# EAGLE board pcb (EAGLE 9.7.0)
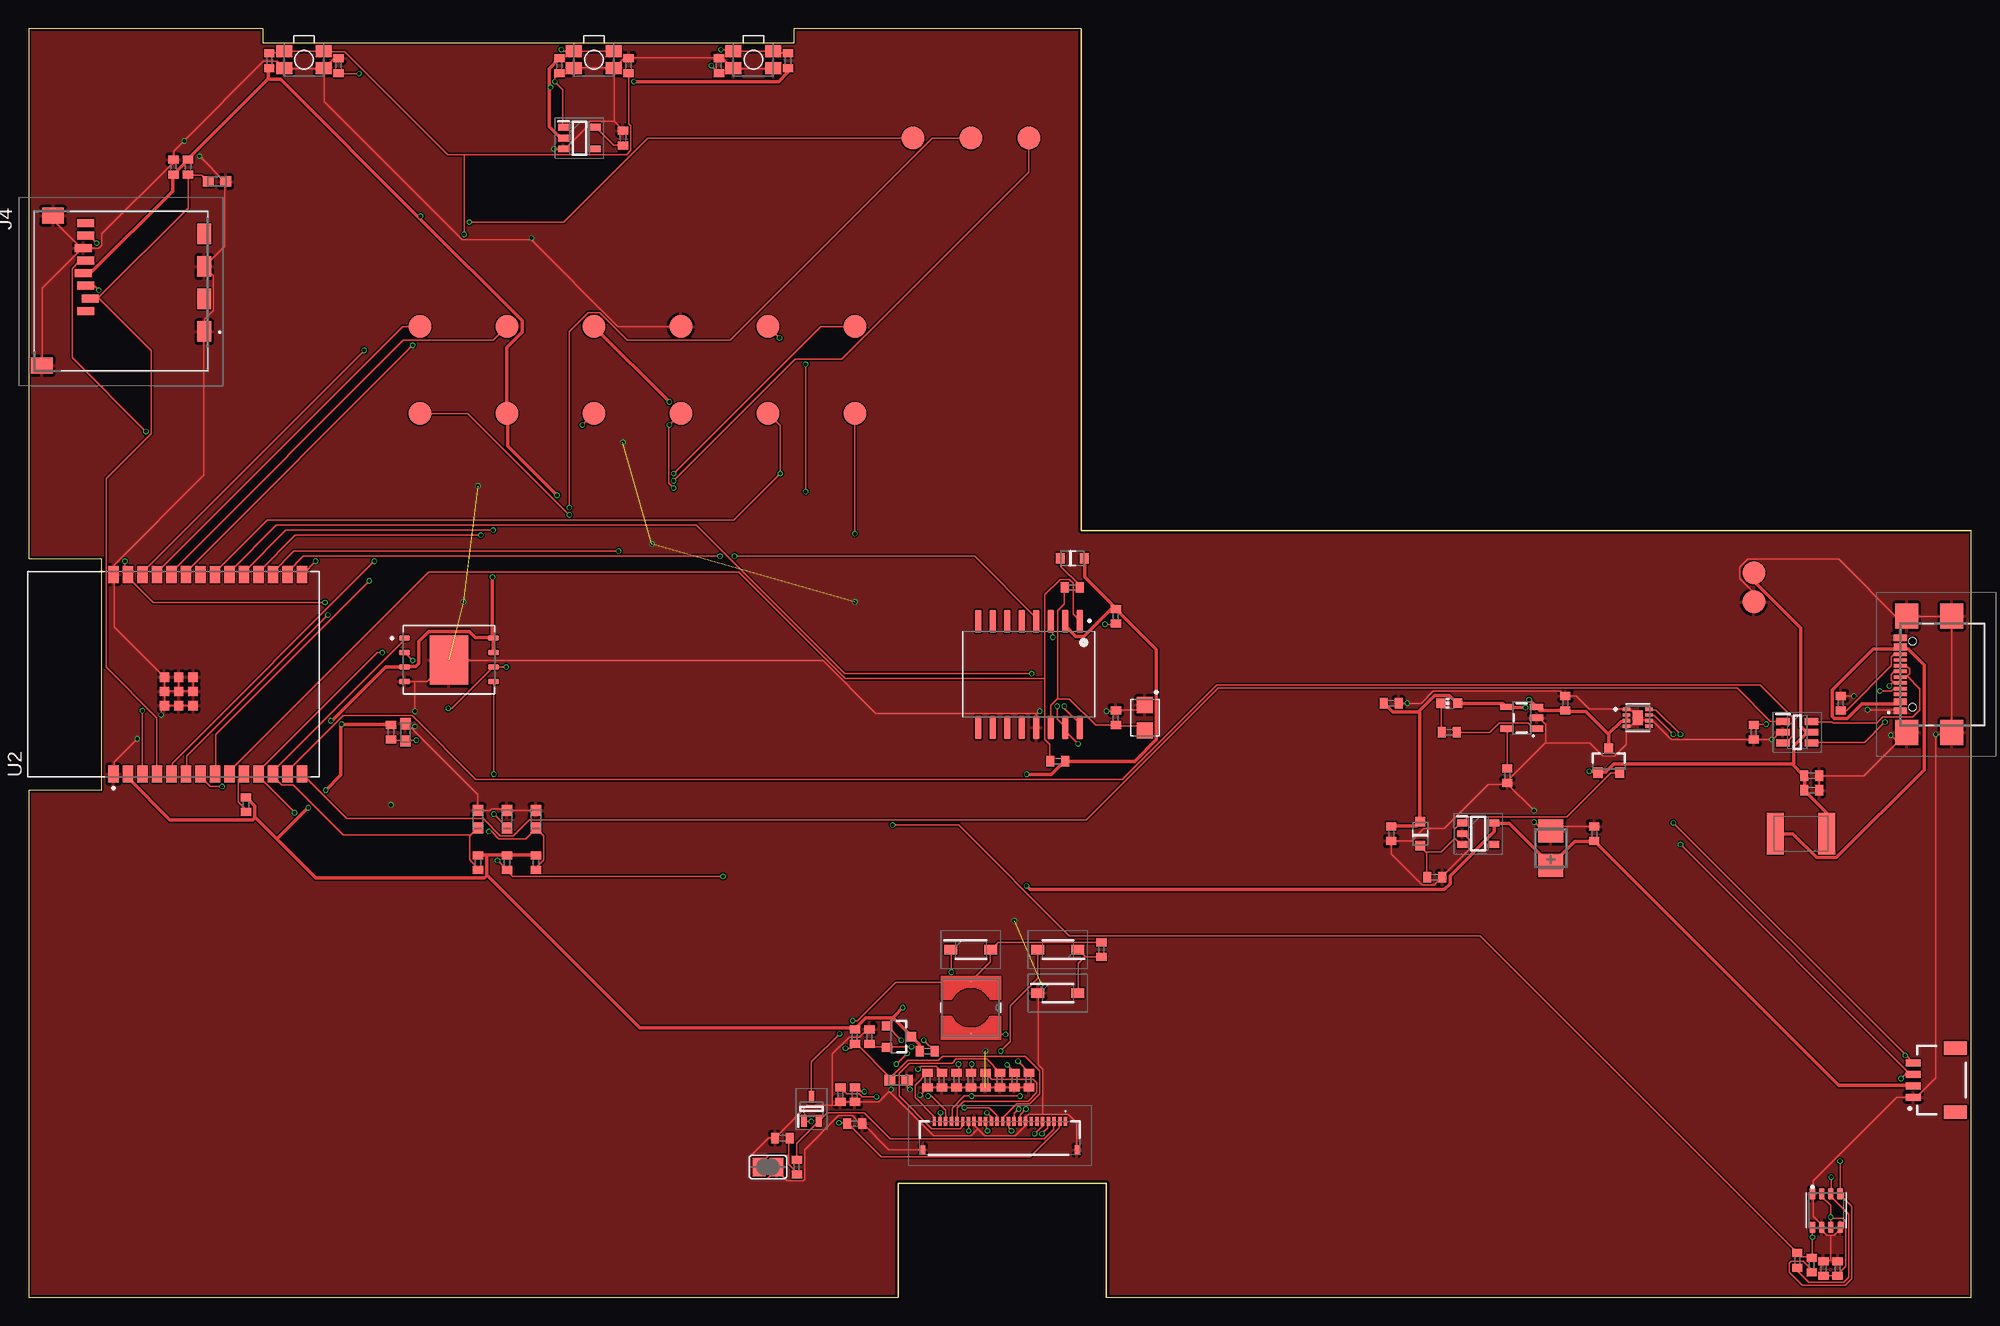
[diagram p0: board, top side]
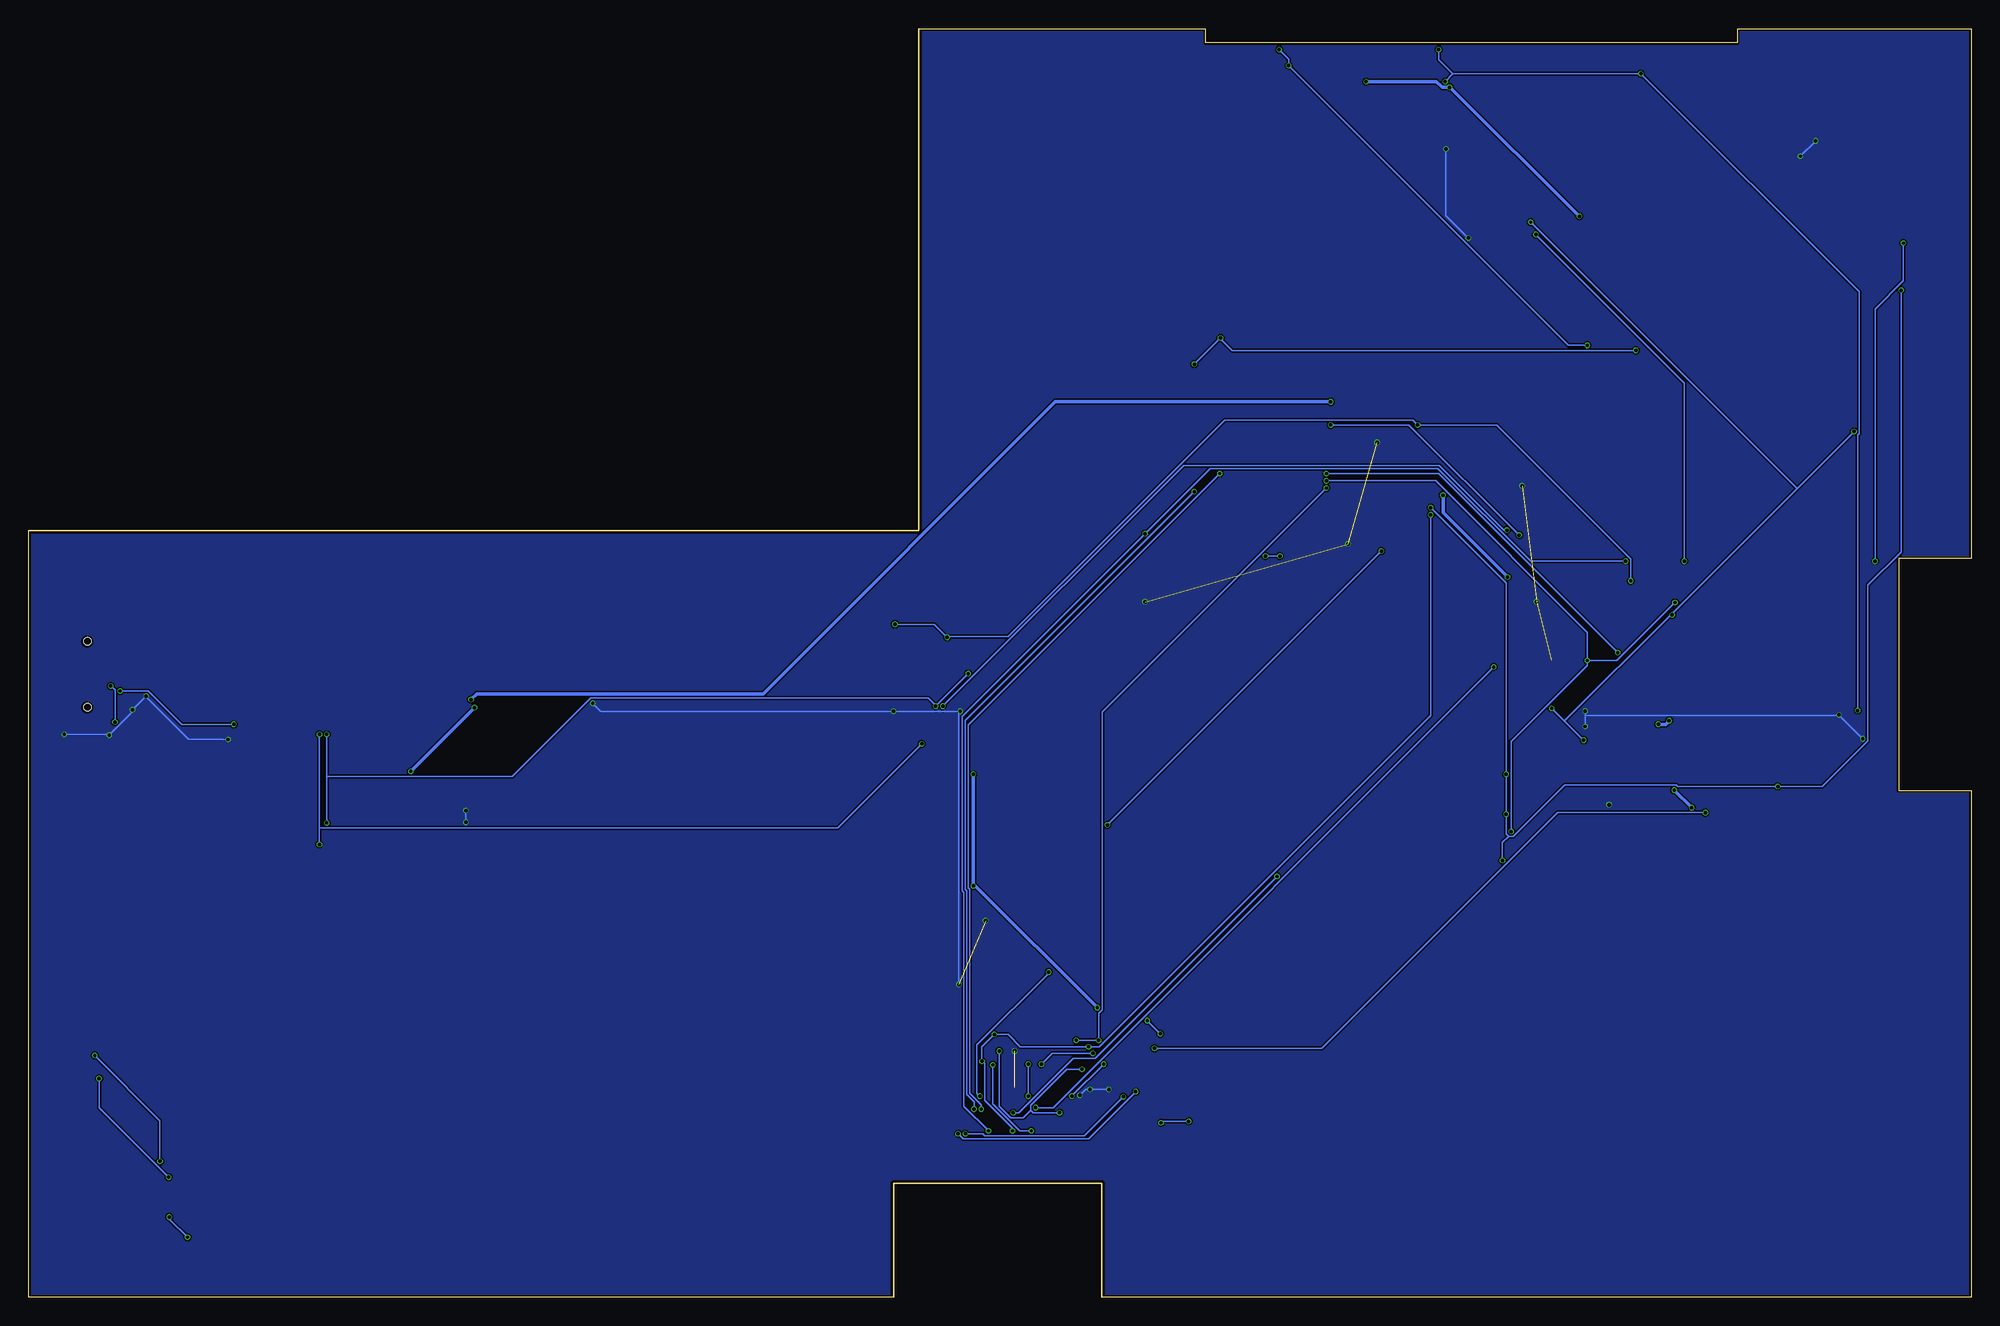
[diagram p1: board, bottom side, seen from below]

Size 170.2 x 111.2 mm. Coordinates in mm from the lower left corner, seen from the top.
Outline: 0,0 76.2,0 76.2,10 94.4,10 94.4,0 170.2,0 170.2,67.2 92.2,67.2 92.2,111.2 67.1,111.2 67.1,109.94 20.5,109.94 20.5,111.2 0,111.2 0,64.77 6.35,64.77 6.35,44.45 0,44.45 0,0
Copper layers (1*16): Top 0.035mm / dielectric 1.6mm / Bottom 0.035mm
Design rules "jlcpcb-2layers.dru": minimum track width 5mil, minimum drill 0.3mm, track to track 5mil, track to pad 5mil, pad to pad 5mil, via to via 5mil, smd to smd 5mil, copper to edge 0.2mm, drill to drill 6mil, minimum pad ring 10mil, minimum via ring 3mil, stop-mask expansion 4mil, vias tented up to drill 0mil, thermal gap 10mil
Net classes: 1 powerlines: width 0.3 mm

## Footprints (pad centres in the part's own frame; a part is rotated, then mirrored left to right if it is on the bottom)
MYBUTTON = smd 1.4 x 1.05: 1 1.75,0.75; 2 -1.75,0.75; 3 -1.75,-0.75; 4 1.75,-0.75
ESP32_WROVER_EAGLE-LTSPICE_C0402 = smd 0.7 x 0.9: 1 -0.65,0; 2 0.65,0
RCL_CT3528 = smd 2 x 2.2: + -1.5,0; - 1.5,0
EAGLE-LTSPICE_C0402 = smd 0.7 x 0.9: 1 -0.65,0; 2 0.65,0
CAPCP3225X100N = smd 1.4 x 1.4: 1 -1.1,0; 2 1.1,0
ADAFRUIT_CHIP-LED0603 = smd 0.8 x 0.8: A 0,-0.75; C 0,0.75
SOT95P280X145-6N = smd 1.2 x 0.6: 1 -1.25,0.95; 2 -1.25,0; 3 -1.25,-0.95; 4 1.25,-0.95; 5 1.25,0; 6 1.25,0.95
ESP32_WROVER_AVX---SD0805S020S1R0_AVX_SD0805S020S1R0_0 = smd 0.8 x 0.9: 1 -1.05,0; 2 1.05,0
SOD3716X135N = smd 1.15 x 0.8: 1 -1.75,0; 2 1.75,0
DIOC1608X36N = smd 0.97 x 0.94: 1 -0.75,0; 2 0.75,0
SOT95P280X125-5N = smd 0.9 x 0.6: 1 -1.4,0.95; 2 -1.4,0; 3 -1.4,-0.95; 4 1.4,-0.95; 5 1.4,0.95
SOT95P280X120-5N = smd 0.9 x 0.6: 1 -1.4,0.95; 2 -1.4,0; 3 -1.4,-0.95; 4 1.4,-0.95; 5 1.4,0.95
FH34SRJ24S05SH99 = smd 0.3 x 0.8: 1 5.75,1.45; 2 5.25,1.45; 3 4.75,1.45; 4 4.25,1.45; 5 3.75,1.45; 6 3.25,1.45; 7 2.75,1.45; 8 2.25,1.45; 9 1.75,1.45; 10 1.25,1.45; 11 0.75,1.45; 12 0.25,1.45; 13 -0.25,1.45; 14 -0.75,1.45; 15 -1.25,1.45; 16 -1.75,1.45; 17 -2.25,1.45; 18 -2.75,1.45; 19 -3.25,1.45; 20 -3.75,1.45; 21 -4.25,1.45; 22 -4.75,1.45; 23 -5.25,1.45; 24 -5.75,1.45 | smd 0.4 x 0.8: MP1 6.75,-1.05; MP2 -6.75,-1.05
SAMACSYS_PARTS_USB4110GFA = smd 0.3 x 1.15: A1 -3.35,3.678; A4 -2.55,3.678; A5 -1.25,3.678; A6 -0.25,3.678; A7 0.25,3.678; A8 1.25,3.678; A9 2.55,3.678; A12 3.35,3.678; B1 3.05,3.678; B4 2.25,3.678; B5 1.75,3.678; B6 0.75,3.678; B7 -0.75,3.678; B8 -1.75,3.678; B9 -2.25,3.678; B12 -3.05,3.678 | smd 2.18 x 2: MP1 -5.11,-0.827; MP2 5.11,-0.827; MP3 -5.11,3.103; MP4 5.11,3.103 | hole 0.65: -2.89,2.603; 2.89,2.603
JST04_1MM_RA = smd 0.6 x 1.35: 1 -1.5,0; 2 -0.5,0; 3 0.5,0; 4 1.5,0 | smd 1.2 x 2: NC1 2.8,-3.675; NC2 -2.8,-3.675
112ATAARR03ATTEND = smd 1.8 x 1.2: G1 10.6,10.4; G2 4.9,10.4; S1 7.75,10.4; S2 2.05,10.4 | smd 1.4 x 1.9: G3 13.6,-3.85; G4 0.45,-2.85 | smd 0.7 x 1.5: P1 8.8,0; P2 7.7,0.4; P3 6.6,0; P4 5.5,-0.2; P5 4.4,0; P6 3.3,-0.2; P7 2.2,0; P8 1.1,0
IND_4828-WE-TPC_WRE = smd 0.127 x 0.127: 1 -2.286,0; 2 2.286,0
ESP32_WROVER_SPARKFUN-IC-POWER_SOT23-5 = smd 0.55 x 1.2: 1 -0.95,-1.3; 2 0,-1.3; 3 0.95,-1.3; 4 0.95,1.3; 5 -0.95,1.3
ESP32C6_VARISTOR_CT/CN1812 = smd 1.5 x 3.6: 1 -2.25,0; 2 2.25,0
ESP32_WROVER_SPARKFUN-DISCRETESEMI_SOT23-3 = smd 0.8 x 0.9: 1 -0.95,-1; 2 0.95,-1; 3 0,1.1
SOT65P210X110-3N = smd 1.05 x 0.5: 1 -1.05,0.65; 2 -1.05,-0.65; 3 1.05,0
ESP32_WROVER_EAGLE-LTSPICE_R0402 = smd 0.7 x 0.9: 1 -0.65,0; 2 0.65,0
ESP32_WROVER_BME680_PSON80P300X300X100-8N = smd 1.016 x 0.5: 1 1.458,1.2; 2 1.458,0.4; 3 1.458,-0.4; 4 1.458,-1.2; 5 -1.458,-1.22; 6 -1.458,-0.4; 7 -1.458,0.4; 8 -1.458,1.2
SJ = smd 1.168 x 1.6: 1 -0.762,0; 2 0.762,0
TP20R = smd 2 x 2: TP 0,0
SON127P600X800X80-9N = smd 0.94 x 0.44: 1 -3.895,1.905; 2 -3.895,0.635; 3 -3.895,-0.635; 4 -3.895,-1.905; 5 3.895,-1.905; 6 3.895,-0.635; 7 3.895,0.635; 8 3.895,1.905 | smd 3.4 x 4.3: 9 0,0
XCVR_ESP32-C6-WROOM-1-N8 = smd 1.5 x 0.9: 1 -8.75,5.26; 2 -8.75,3.99; 3 -8.75,2.72; 4 -8.75,1.45; 5 -8.75,0.18; 6 -8.75,-1.09; 7 -8.75,-2.36; 8 -8.75,-3.63; 9 -8.75,-4.9; 10 -8.75,-6.17; 11 -8.75,-7.44; 12 -8.75,-8.71; 13 -8.75,-9.98; 14 -8.75,-11.25; 15 8.75,-11.25; 16 8.75,-9.98; 17 8.75,-8.71; 18 8.75,-7.44; 19 8.75,-6.17; 20 8.75,-4.9; 21 8.75,-3.63; 22 8.75,-2.36; 23 8.75,-1.09; 24 8.75,0.18; 25 8.75,1.45; 26 8.75,2.72; 27 8.75,3.99; 28 8.75,5.26 | smd 0.8 x 0.8: 29_1 -2.755,0.79; 29_2 -1.505,0.79; 29_3 -0.255,0.79; 29_4 -2.755,-0.46; 29_5 -1.505,-0.46; 29_6 -0.255,-0.46; 29_7 -2.755,-1.71; 29_8 -1.505,-1.71; 29_9 -0.255,-1.71
SOIC127P1032X265-16N = smd 2.05 x 0.59: 1 -4.655,4.445; 2 -4.655,3.175; 3 -4.655,1.905; 4 -4.655,0.635; 5 -4.655,-0.635; 6 -4.655,-1.905; 7 -4.655,-3.175; 8 -4.655,-4.445; 9 4.655,-4.445; 10 4.655,-3.175; 11 4.655,-1.905; 12 4.655,-0.635; 13 4.655,0.635; 14 4.655,1.905; 15 4.655,3.175; 16 4.655,4.445
SON50P200X200X80-9N = smd 0.76 x 0.27: 1 -0.985,0.75; 2 -0.985,0.25; 3 -0.985,-0.25; 4 -0.985,-0.75; 5 0.985,-0.75; 6 0.985,-0.25; 7 0.985,0.25; 8 0.985,0.75 | smd 0.9 x 1.3: 9 0,0

## Placement (x,y rotation side)
BOOT_BUTTON  BUTTON_CUSYOMV1  [MYBUTTON]  24.13,108.45 180 top
C1  100nF  [ESP32_WROVER_EAGLE-LTSPICE_C0402]  157.24,2.54 90 top
C1_BAT  4.7uF  [ESP32_WROVER_EAGLE-LTSPICE_C0402]  119.38,52.07 0 top
C1_BAT1  4.7uF  [ESP32_WROVER_EAGLE-LTSPICE_C0402]  123.19,36.83 0 top
C1_BAT2  4.7uF  [ESP32_WROVER_EAGLE-LTSPICE_C0402]  137.16,40.64 90 top
C2  100nF  [ESP32_WROVER_EAGLE-LTSPICE_C0402]  158.47,2.54 90 top
C2_BAT  4.7uF  [ESP32_WROVER_EAGLE-LTSPICE_C0402]  134.62,52.07 90 top
C3  100uF TANT  [RCL_CT3528]  133.35,39.37 90 top
C4  4.7uF/25V  [EAGLE-LTSPICE_C0402]  93.98,30.48 90 top
C4_USB  100nF  [EAGLE-LTSPICE_C0402]  156.21,45.72 0 top
C5  1uF  [ESP32_WROVER_EAGLE-LTSPICE_C0402]  27.16,107.95 90 top
C5_USB  4.7uF  [EAGLE-LTSPICE_C0402]  156.21,44.45 0 top
C6  100nF  [ESP32_WROVER_EAGLE-LTSPICE_C0402]  52.56,107.95 90 top
C7  10uF  [EAGLE-LTSPICE_C0402]  73.66,22.86 90 top
C8  100nF  [ESP32_WROVER_EAGLE-LTSPICE_C0402]  95.25,50.8 90 top
C9  100nF  [ESP32_WROVER_EAGLE-LTSPICE_C0402]  12.7,99.06 90 top
C10  100nF  [ESP32_WROVER_EAGLE-LTSPICE_C0402]  60.47,107.95 90 top
C10_SUPERCAP  CPH3225A  [CAPCP3225X100N]  97.79,50.8 270 top
C_DELAY  100nF  [ESP32_WROVER_EAGLE-LTSPICE_C0402]  52.07,101.6 90 top
CHANGE_BUTTON  BUTTON_CUSYOMV1  [MYBUTTON]  63.5,108.45 180 top
CHG_LED  [ADAFRUIT_CHIP-LED0603]  124.46,52.07 90 top
D1  USBLC6-2SC6Y  [SOT95P280X145-6N]  154.94,49.53 0 top
D2  ESP32_WROVER_AVX---SD0805S020S1R0_AVX_SD0805S020S1R0_0_0AVX_SD0805S020S1R0_0_0  [ESP32_WROVER_AVX---SD0805S020S1R0_AVX_SD0805S020S1R0_0]  121.92,40.64 90 top
D3  MBR0530  [SOD3716X135N]  90.17,26.67 0 top
D4  MBR0530  [SOD3716X135N]  90.17,30.48 180 top
D5  MBR0530  [SOD3716X135N]  82.55,30.48 0 top
D6  PGB1010603MR  [DIOC1608X36N]  76.2,19.05 0 top
D7  ESP32_WROVER_AVX---SD0805S020S1R0_AVX_SD0805S020S1R0_0_0AVX_SD0805S020S1R0_0_0  [ESP32_WROVER_AVX---SD0805S020S1R0_AVX_SD0805S020S1R0_0]  91.44,64.77 0 top
D8  PGB1010603MR  [DIOC1608X36N]  16.51,97.79 0 top
D9  PGB1010603MR  [DIOC1608X36N]  39.37,41.91 90 top
D10  PGB1010603MR  [DIOC1608X36N]  33.02,49.53 90 top
D11  PGB1010603MR  [DIOC1608X36N]  41.91,41.91 90 top
D12  PGB1010603MR  [DIOC1608X36N]  44.45,41.91 90 top
EPD_C1  1uF/50V  [EAGLE-LTSPICE_C0402]  72.39,17.78 90 top
EPD_C2  1uF/50v  [EAGLE-LTSPICE_C0402]  71.12,17.78 90 top
EPD_C5  0.1uF/50V  [EAGLE-LTSPICE_C0402]  87.63,19.05 90 top
EPD_C6  1uF/50V  [EAGLE-LTSPICE_C0402]  86.36,19.05 90 top
EPD_C7  1uF/50V  [EAGLE-LTSPICE_C0402]  85.09,19.05 90 top
EPD_C8  1uF/50V  [EAGLE-LTSPICE_C0402]  83.82,19.05 90 top
EPD_C9  1uF/50V  [EAGLE-LTSPICE_C0402]  82.55,19.05 90 top
EPD_C10  1uF/50V  [EAGLE-LTSPICE_C0402]  81.28,19.05 90 top
EPD_C11  1uF/50V  [EAGLE-LTSPICE_C0402]  80.01,19.05 90 top
EPD_C12  1uF/50V  [EAGLE-LTSPICE_C0402]  78.74,19.05 90 top
IC1  BD5229G-TR  [SOT95P280X125-5N]  48.26,101.6 0 top
IC4  XC6220A331MR-G  [SOT95P280X120-5N]  127,40.64 0 top
J1  FH34SRJ-24S-0.5SH_99_  [FH34SRJ24S05SH99]  85.09,13.97 0 top
J2  SAMACSYS_PARTS_USB4110-GF-A  [SAMACSYS_PARTS_USB4110GFA]  167.64,54.61 90 top
J3  QWIIC_RIGHT_ANGLE  [JST04_1MM_RA]  165.1,19.05 90 top
J4  112A-TAAR-R03_ATTEND  [112ATAARR03ATTEND]  5,95.25 270 top
L1  68uH  [IND_4828-WE-TPC_WRE]  82.55,25.39 270 top
MCP73831  ESP32_WROVER_SPARKFUN-IC-POWER_MCP73831  [ESP32_WROVER_SPARKFUN-IC-POWER_SOT23-5]  130.81,50.8 90 top
PFMF.050.1  ESP32C6_VARISTORCN1812  [ESP32C6_VARISTOR_CT/CN1812]  155.26,40.64 0 top
Q1  20V/4.2A/52mΩ/1.4W  [ESP32_WROVER_SPARKFUN-DISCRETESEMI_SOT23-3]  138.43,46.99 0 top
Q2  20V/4.2A/52mΩ/1.4W  [ESP32_WROVER_SPARKFUN-DISCRETESEMI_SOT23-3]  76.2,22.86 270 top
Q3  SI1308EDL-T1-GE3  [SOT65P210X110-3N]  68.58,16.51 90 top
R1  10K  [ESP32_WROVER_EAGLE-LTSPICE_R0402]  19.05,43.18 90 top
R1_BAT  200  [ESP32_WROVER_EAGLE-LTSPICE_R0402]  124.46,49.53 0 top
R1_PINH  10K  [ESP32_WROVER_EAGLE-LTSPICE_R0402]  154.94,3.26 90 top
R1_PINH1  10K  [ESP32_WROVER_EAGLE-LTSPICE_R0402]  95.25,59.69 90 top
R1_PWRUSB  100K  [ESP32_WROVER_EAGLE-LTSPICE_R0402]  119.38,40.64 90 top
R2  2.2  [ESP32_WROVER_EAGLE-LTSPICE_R0402]  66.04,13.97 0 top
R2-USB  5k1  [ESP32_WROVER_EAGLE-LTSPICE_R0402]  158.75,52.07 90 top
R2-USB1  5k1  [ESP32_WROVER_EAGLE-LTSPICE_R0402]  151.13,49.53 90 top
R2_BAT  2K  [ESP32_WROVER_EAGLE-LTSPICE_R0402]  129.54,45.72 90 top
R2_PINH  10K  [ESP32_WROVER_EAGLE-LTSPICE_R0402]  156.21,2.85 90 top
R2_PINH1  10K  [ESP32_WROVER_EAGLE-LTSPICE_R0402]  90.17,46.99 0 top
R3  0.47  [ESP32_WROVER_EAGLE-LTSPICE_R0402]  67.31,11.43 90 top
R4  10K  [ESP32_WROVER_EAGLE-LTSPICE_R0402]  72.39,15.24 180 top
R5  10K  [ESP32_WROVER_EAGLE-LTSPICE_R0402]  39.37,38.1 90 top
R6  10K  [ESP32_WROVER_EAGLE-LTSPICE_R0402]  31.75,49.53 90 top
R7  10K  [ESP32_WROVER_EAGLE-LTSPICE_R0402]  41.91,38.1 90 top
R8  10K  [ESP32_WROVER_EAGLE-LTSPICE_R0402]  44.45,38.1 90 top
R9  10K  [ESP32_WROVER_EAGLE-LTSPICE_R0402]  72.39,22.86 90 top
R10  10K  [ESP32_WROVER_EAGLE-LTSPICE_R0402]  13.97,99.06 90 top
R_BOOT  10K  [ESP32_WROVER_EAGLE-LTSPICE_R0402]  21.08,108.38 270 top
R_CAPACITOR  15  [ESP32_WROVER_EAGLE-LTSPICE_R0402]  91.44,62.23 0 top
R_CHANGE  10K  [ESP32_WROVER_EAGLE-LTSPICE_R0402]  66.53,108.38 270 top
R_CL1  10K  [ESP32_WROVER_EAGLE-LTSPICE_R0402]  78.74,21.59 180 top
R_RESET  10K  [ESP32_WROVER_EAGLE-LTSPICE_R0402]  46.5,107.95 90 top
RESET_BUTTON  BUTTON_CUSYOMV1  [MYBUTTON]  49.53,108.47 180 top
SENSOR2  ESP32_WROVER_BME680_BME680  [ESP32_WROVER_BME680_PSON80P300X300X100-8N]  157.48,7.62 90 top
SJ1  [SJ]  64.77,11.43 180 top
TP1  TPTP20R  [TP20R]  34.29,85.09 0 top
TP2  TPTP20R  [TP20R]  41.91,85.09 0 top
TP3  TPTP20R  [TP20R]  49.53,85.09 0 top
TP4  TPTP20R  [TP20R]  151.13,60.96 0 top
TP5  TPTP20R  [TP20R]  57.15,85.09 0 top
TP6  TPTP20R  [TP20R]  87.63,101.6 0 top
TP7  TPTP20R  [TP20R]  82.55,101.6 0 top
TP8  TPTP20R  [TP20R]  77.47,101.6 0 top
TP9  TPTP20R  [TP20R]  64.77,85.09 0 top
TP10  TPTP20R  [TP20R]  72.39,85.09 0 top
TP11  TPTP20R  [TP20R]  72.39,77.47 0 top
TP12  TPTP20R  [TP20R]  64.77,77.47 0 top
TP13  TPTP20R  [TP20R]  57.15,77.47 0 top
TP14  TPTP20R  [TP20R]  151.13,63.5 0 top
TP15  TPTP20R  [TP20R]  49.53,77.47 0 top
TP16  TPTP20R  [TP20R]  41.91,77.47 0 top
TP17  TPTP20R  [TP20R]  34.29,77.47 0 top
U1  W25Q512JVEIQ  [SON127P600X800X80-9N]  36.83,55.88 0 top
U2  ESP32-C6-WROOM-1-N8  [XCVR_ESP32-C6-WROOM-1-N8]  12.7,54.61 90 top
U3  DS3231SN#  [SOIC127P1032X265-16N]  87.63,54.61 270 top
U4  MAX17048G+T10  [SON50P200X200X80-9N]  140.97,50.8 0 top

## Library data of the parts
BOOT_BUTTON CHANGE_BUTTON CHG_LED PFMF.050.1 RESET_BUTTON SJ1 TP1-TP17 = DeskAssistant v19 v1
C1 C1_BAT C1_BAT1 C1_BAT2 C2 C2_BAT C4 C4_USB C5 C5_USB C6-C10 C_DELAY EPD_C1 EPD_C2 EPD_C5-EPD_C12 = DeskAssistant v19 v1; SPICEMODEL: NONE; SPICEPREFIX: C
C3 = DeskAssistant v19 v1; SPICEPREFIX: C
C10_SUPERCAP = DeskAssistant v19 v1; AVAILABILITY: Not in stock; CHECK_PRICES: https://www.snapeda.com/parts/CPH3225A/Seiko+Instruments/view-part/?ref=eda; DESCRIPTION: 11 mF (EDLC) Supercapacitor 3.3 V 1210 (3225 Metric) - -; MF: Seiko Instruments; MP: CPH3225A; PACKAGE: 1210 Seiko; PRICE: None; PURCHASE-URL: https://www.snapeda.com/api/url_track_click_mouser/?unipart_id=562593&manufacturer=Seiko Instruments&part_name=CPH3225A&search_term=None; SNAPEDA_LINK: https://www.snapeda.com/parts/CPH3225A/Seiko+Instruments/view-part/?ref=snap
D1 = DeskAssistant v19 v1; AVAILABILITY: In Stock; CHECK_PRICES: https://www.snapeda.com/parts/USBLC6-2SC6Y/STMicroelectronics/view-part/?ref=eda; DESCRIPTION: 17V Clamp 5A (8/20µs) Ipp Tvs Diode Surface Mount SOT-23-6; MF: STMicroelectronics; MP: USBLC6-2SC6Y; PACKAGE: SOT-23-6 STMicroelectronics; PRICE: None; SNAPEDA_LINK: https://www.snapeda.com/parts/USBLC6-2SC6Y/STMicroelectronics/view-part/?ref=snap
D2 D7 = DeskAssistant v19 v1; CENTROID_NOT_SPECIFIED: No; DATASHEET: http://datasheets.avx.com/schottky.pdf; DIGIKEY_DESCRIPTION: DIODE SCHOTTKY 20V 1A 0805; DIGIKEY_PART_NUMBER: 478-7800-1-ND; LEAD_FREE: yes; MF: AVX; MOUSER_PART_NUMBER: 581-SD0805S020S1R0; PACKAGE: 0805 (2012 metric); PREFIX: D; ROHS: yes; TEMPERATURE_RANGE_HIGH: +125°C; TEMPERATURE_RANGE_LOW: -55°C
D3-D5 = DeskAssistant v19 v1; AVAILABILITY: In Stock; CHECK_PRICES: https://www.snapeda.com/parts/MBR0530/Onsemi/view-part/?ref=eda; DESCRIPTION: Diode Schottky 30 V 500mA Surface Mount SOD-123; MF: ON Semiconductor; MP: MBR0530; PACKAGE: SOD-123-2 ON Semiconductor; PRICE: None; PURCHASE-URL: https://www.snapeda.com/api/url_track_click_mouser/?unipart_id=179458&manufacturer=ON Semiconductor&part_name=MBR0530&search_term=None; SNAPEDA_LINK: https://www.snapeda.com/parts/MBR0530/Onsemi/view-part/?ref=snap
D6 D8-D12 = DeskAssistant v19 v1; AVAILABILITY: In Stock; CHECK_PRICES: https://www.snapeda.com/parts/PGB1010603MR/Littelfuse/view-part/?ref=eda; DESCRIPTION: 150V (Typ) Clamp - Ipp Tvs Diode Surface Mount 0603 (1608 Metric); MF: Littelfuse Inc.; MP: PGB1010603MR; PACKAGE: 0603 Littelfuse Inc.; PRICE: None; PURCHASE-URL: https://www.snapeda.com/api/url_track_click_mouser/?unipart_id=5659453&manufacturer=Littelfuse Inc.&part_name=PGB1010603MR&search_term=None; SNAPEDA_LINK: https://www.snapeda.com/parts/PGB1010603MR/Littelfuse/view-part/?ref=snap
IC1 = DeskAssistant v19 v1; DESCRIPTION: Voltage Detector with Adjustable Delay Time: CMOS processes are utilized to develop high precision, low current consumption CMOS reset ICs that allow arbitrary setting of the delay time. The extensive lineup includes both Nch Open Drain and CMOS output types in a wide range of detection voltages (from 2.3V to 6.0V, in 0.1V steps), enabling selection of the ideal solution based on customer requirements. In addition, the entire series is of course both lead-free and RoHS-compliant.; HEIGHT: 1.25mm; MANUFACTURER_NAME: ROHM Semiconductor; MANUFACTURER_PART_NUMBER: BD5229G-TR; MOUSER_PART_NUMBER: 755-BD5229G-TR; MOUSER_PRICE-STOCK: https://www.mouser.co.uk/ProductDetail/ROHM-Semiconductor/BD5229G-TR?qs=4kLU8WoGk0vvnhrrYwdszw%3D%3D
IC4 = DeskAssistant v19 v1; DESCRIPTION: LDO Voltage Regulators; HEIGHT: 1.2mm; MANUFACTURER_NAME: Torex; MANUFACTURER_PART_NUMBER: XC6220A331MR-G; MOUSER_PART_NUMBER: 865-XC6220A331MR-G; MOUSER_PRICE-STOCK: https://www.mouser.co.uk/ProductDetail/Torex-Semiconductor/XC6220A331MR-G?qs=AsjdqWjXhJ8ZSWznL1J0gg%3D%3D
J1 = DeskAssistant v19 v1; DESCRIPTION: 24 Position FFC, FPC Connector Contacts, Top and Bottom 0.020" (0.50mm) Surface Mount, Right Angle; HEIGHT: 1.1mm; MANUFACTURER_NAME: Hirose; MANUFACTURER_PART_NUMBER: FH34SRJ-24S-0.5SH(99); MOUSER_PART_NUMBER: 798-FH34SRJ24S05SH99; MOUSER_PRICE-STOCK: https://www.mouser.co.uk/ProductDetail/Hirose-Connector/FH34SRJ-24S-0.5SH99?qs=vcbW%252B4%252BSTIpKBl5ap9J8Fw%3D%3D
J2 = DeskAssistant v19 v1; DESCRIPTION: CONN USB 2.0 TYPE-C R/A SMT; HEIGHT: 3.26mm; MANUFACTURER_NAME: GCT (GLOBAL CONNECTOR TECHNOLOGY); MANUFACTURER_PART_NUMBER: USB4110-GF-A; MOUSER_PART_NUMBER: 640-USB4110-GF-A; MOUSER_PRICE-STOCK: https://www.mouser.co.uk/ProductDetail/GCT/USB4110-GF-A?qs=KUoIvG%2F9IlYiZvIXQjyJeA%3D%3D
J3 = DeskAssistant v19 v1; PROD_ID: CONN-13694
J4 = DeskAssistant v19 v1; DESCRIPTION: Micro SD Card Socket, Push-Push Type, Top Mount, SMT, H=1.83mm, 10u; HEIGHT: 1.9mm; MANUFACTURER_NAME: ATTEND; MANUFACTURER_PART_NUMBER: 112A-TAAR-R03 ATTEND
L1 = DeskAssistant v19 v1; COPYRIGHT: Copyright (C) 2024 Ultra Librarian. All rights reserved.; MANUFACTURER_PART_NUMBER: 744043680; MFR_NAME: Wurth Electronics
MCP73831 = DeskAssistant v19 v1; PROD_ID: IC-09995
Q1 Q2 = DeskAssistant v19 v1; PROD_ID: TRAN-14388
Q3 = DeskAssistant v19 v1; AVAILABILITY: In Stock; CHECK_PRICES: https://www.snapeda.com/parts/SI1308EDL-T1-GE3/Vishay+Siliconix/view-part/?ref=eda; DESCRIPTION: Si1308EDL-T1-GE3 N-channel MOSFET Transistor, 1.5 A, 30 V, 3-Pin SC-70 | Siliconix / Vishay SI1308EDL-T1-GE3; MF: Vishay Siliconix; MP: SI1308EDL-T1-GE3; PACKAGE: SOT-323 Vishay Semiconductor; PRICE: None; PURCHASE-URL: https://www.snapeda.com/api/url_track_click_mouser/?unipart_id=274603&manufacturer=Vishay Siliconix&part_name=SI1308EDL-T1-GE3&search_term=None; SNAPEDA_LINK: https://www.snapeda.com/parts/SI1308EDL-T1-GE3/Vishay+Siliconix/view-part/?ref=snap
R1 R1_BAT R1_PINH R1_PINH1 R1_PWRUSB R2 R2-USB R2-USB1 R2_BAT R2_PINH R2_PINH1 R3-R10 R_BOOT R_CAPACITOR R_CHANGE R_CL1 R_RESET = DeskAssistant v19 v1; SPICEMODEL: NONE; SPICEPREFIX: R
SENSOR2 = DeskAssistant v19 v1; AVAILABILITY: Unavailable; DESCRIPTION: Integrated Environmental Unit; MF: Bosch Sensortec; MP: BME680; PACKAGE: LGA-8 Bosch Tools; PRICE: None
U1 = DeskAssistant v19 v1; AVAILABILITY: In Stock; CHECK_PRICES: https://www.snapeda.com/parts/W25Q512JVEIQ/Winbond+Electronics/view-part/?ref=eda; DESCRIPTION: FLASH - NOR Memory IC 512Mb (64M x 8) SPI - Quad I/O 133 MHz 8-WSON (8x6); MF: Winbond Electronics; MP: W25Q512JVEIQ; PACKAGE: Package; PRICE: None; SNAPEDA_LINK: https://www.snapeda.com/parts/W25Q512JVEIQ/Winbond+Electronics/view-part/?ref=snap
U2 = DeskAssistant v19 v1; AVAILABILITY: In Stock; CHECK_PRICES: https://www.snapeda.com/parts/ESP32-C6-WROOM-1-N8/Espressif+Systems/view-part/?ref=eda; DESCRIPTION: Multiprotocol Modules ESP32-C6 module, Wi-Fi 6 in 2.4 GHz band, Bluetooth 5, Zigbee 3.0 and Thread. ESP34-WROOM Compatible - ENGINEERING SAMPLE; MF: Espressif Systems; MP: ESP32-C6-WROOM-1-N8; PACKAGE: None; PRICE: None; SNAPEDA_LINK: https://www.snapeda.com/parts/ESP32-C6-WROOM-1-N8/Espressif+Systems/view-part/?ref=snap
U3 = DeskAssistant v19 v1; AVAILABILITY: In Stock; CHECK_PRICES: https://www.snapeda.com/parts/DS3231SN%23/Analog+Devices/view-part/?ref=eda; DESCRIPTION: Extremely Accurate I²C-Integrated RTC/TCXO/Crystal; MF: Analog Devices; MP: DS3231SN#; PACKAGE: SOIC-16 Maxim; PRICE: None; PURCHASE-URL: https://www.snapeda.com/api/url_track_click_mouser/?unipart_id=99048&manufacturer=Analog Devices&part_name=DS3231SN#&search_term=None; SNAPEDA_LINK: https://www.snapeda.com/parts/DS3231SN%23/Analog+Devices/view-part/?ref=snap
U4 = DeskAssistant v19 v1; AVAILABILITY: In Stock; CHECK_PRICES: https://www.snapeda.com/parts/MAX17048G+T10/Analog+Devices/view-part/?ref=eda; DESCRIPTION: 3µA 1-Cell/2-Cell Fuel Gauge with ModelGauge; MF: Analog Devices; MP: MAX17048G+T10; PACKAGE: TDFN-8 Maxim; PRICE: None; PURCHASE-URL: https://www.snapeda.com/api/url_track_click_mouser/?unipart_id=329239&manufacturer=Analog Devices&part_name=MAX17048G+T10&search_term=None; SNAPEDA_LINK: https://www.snapeda.com/parts/MAX17048G+T10/Analog+Devices/view-part/?ref=snap

## Nets
3V3 [powerlines]: C1_BAT2.1 C3.+ C9.1 D7.2 IC1.2 IC4.5 J3.2 J4.P4 Q2.3 R1.2 R1_PINH1.2 R2_PINH1.2 R5.2 R6.2 R7.2 R8.2 R9.2 R10.2 R_BOOT.2 R_CHANGE.2 R_CL1.2 R_RESET.2 TP16.TP U1.3 U1.7 U1.8 U2.2 U3.2
32KHZ: R2_PINH1.1 U2.9 U3.1
DN: D1.4 J2.A7 J2.B7
DP: D1.6 J2.A6 J2.B6
EPD_3V3: C7.1 EPD_C5.2 J1.15 J1.16 L1.2 Q2.2 TP17.TP
EPD_3V3_C: Q2.1 R_CL1.1 TP13.TP U2.18
EPD_BUSY: J1.9 TP9.TP U2.26
EPD_CS: D6.1 J1.12 R9.1 TP10.TP U2.11
EPD_DC: J1.11 TP11.TP U2.5
EPD_RST: J1.10 TP12.TP U2.21
FLASH_CS: D9.1 R5.1 U1.1 U2.12
GDR: J1.2 Q3.1 R4.2
GND: BOOT_BUTTON.1 BOOT_BUTTON.2 C1.2 C1_BAT1.2 C1_BAT2.2 C1_BAT.2 C2.2 C2_BAT.2 C3.- C4_USB.2 C5.2 C5_USB.2 C6.2 C7.2 C8.2 C9.2 C10.2 C10_SUPERCAP.1 C_DELAY.2 CHANGE_BUTTON.1 CHANGE_BUTTON.2 D1.2 D3.1 D6.2 D8.2 D9.2 D10.2 D11.2 D12.2 EPD_C1.1 EPD_C2.1 EPD_C5.1 EPD_C6.1 EPD_C7.1 EPD_C8.1 EPD_C9.1 EPD_C10.1 EPD_C11.1 EPD_C12.1 IC1.3 IC4.2 J1.8 J1.17 J1.MP1 J1.MP2 J2.A1 J2.A12 J2.B1 J2.B12 J2.MP1 J2.MP2 J2.MP3 J2.MP4 J3.1 J4.G1 J4.G2 J4.G3 J4.G4 J4.P6 MCP73831.2 R1_PWRUSB.1 R2-USB1.1 R2-USB.2 R2.1 R2_BAT.1 R4.1 RESET_BUTTON.1 RESET_BUTTON.2 SENSOR2.1 SENSOR2.5 SENSOR2.7 SJ1.1 TP4.TP TP5.TP U1.4 U1.9 U2.1 U2.28 U2.29_1 U2.29_2 U2.29_3 U2.29_4 U2.29_5 U2.29_6 U2.29_7 U2.29_8 U2.29_9 U3.13 U4.1 U4.4 U4.6 U4.9
GPIO8: R1.1 U2.10
I2C_PW: C1.1 C2.1 R1_PINH.2 R2_PINH.2 SENSOR2.2 SENSOR2.6 SENSOR2.8 U2.17
INT_RTC: R1_PINH1.1 TP15.TP U2.8 U3.3
IO/BOOT: BOOT_BUTTON.3 BOOT_BUTTON.4 C6.1 R_BOOT.1 U2.15
IO/CHANGE: C10.1 CHANGE_BUTTON.3 CHANGE_BUTTON.4 R_CHANGE.1 U2.23
MISO: D12.1 J4.P7 R8.1 TP6.TP U1.2 U2.27
MOSI: D11.1 J1.14 J4.P3 R7.1 TP7.TP U1.5 U2.7
N$1: J2.B5 R2-USB.1
N$2: C4.1 D3.2 D4.1
N$3: C1_BAT1.1 D2.1 IC4.1 IC4.3 Q1.2
N$4: EPD_C12.2 J1.24
N$5: MCP73831.1 R1_BAT.2
N$6: CHG_LED.C R1_BAT.1
N$7: MCP73831.5 R2_BAT.2
N$8: C_DELAY.1 IC1.5
N$9: J2.A5 R2-USB1.2
N$10: EPD_C10.2 J1.22
N$11: D7.1 R_CAPACITOR.2
N$12: EPD_C8.2 J1.20
N$13: EPD_C7.2 J1.19
N$14: EPD_C6.2 J1.18
N$22: EPD_C1.2 J1.4
N$23: EPD_C2.2 J1.5
PREVGH: D5.1 EPD_C9.2 J1.21
PREVGL: D4.2 EPD_C11.2 J1.23
RESE: J1.3 Q3.2 R3.2
RESE': R2.2 R3.1 SJ1.2
RESET: C5.1 IC1.1 R_RESET.1 RESET_BUTTON.3 RESET_BUTTON.4 U2.3
RTC_RST: U2.16 U3.4
RX: TP2.TP U2.24
SCK: D10.1 J1.13 J4.P5 R6.1 TP8.TP U1.6 U2.6
SCL: J3.4 R2_PINH.1 SENSOR2.4 U2.20 U3.16 U4.7
SDA: J3.3 R1_PINH.1 SENSOR2.3 U2.19 U3.15 U4.8
SRC: C4.2 D5.2 L1.1 Q3.3
SS_SD: D8.1 J4.P2 R10.1 U2.4
TX: TP1.TP U2.25
USB_D+: D1.1 U2.14
USB_D-: D1.3 U2.13
VBAT [powerlines]: C2_BAT.1 MCP73831.3 Q1.3 TP3.TP U4.2 U4.3
VBUS [powerlines]: C1_BAT.1 C4_USB.1 C5_USB.1 CHG_LED.A D1.5 D2.2 MCP73831.4 PFMF.050.1.2 Q1.1 R1_PWRUSB.2 TP14.TP
VRTC: C8.1 C10_SUPERCAP.2 R_CAPACITOR.1 U3.14
VUSB [powerlines]: J2.A4 J2.A9 J2.B4 J2.B9 PFMF.050.1.1

## Tracks (layer width: path | path; a pad name or v marks a point on that pad's centre or on a via)
3V3  (via drill 0.3)
  Top 0.3: 45.59,106.05 45.59,102.62 46.61,101.6 IC1.2 | 45.59,106.05 45.59,107.7 46.48,108.58 R_RESET.2 | v53.02,106.55 65.72,106.55 66.48,107.31 66.48,107.7 R_CHANGE.2 | v45.72,106.05 45.59,106.05 | 21.02,106.81 21.02,107.7 R_BOOT.2 | 21.02,106.81 14.03,99.82 R10.2 13.97,99.69 12.7,98.42 C9.1 12.64,98.3 12.64,96.97 5.46,89.79 4.83,89.79 J4.P4 | 34.2,94.65 22.1,106.74 21.14,106.74 21.02,106.81 | 34.2,94.65 43.24,85.6 43.24,84.58 41.91,83.25 TP16.TP 41.97,77.34 41.97,74.61 v46.29,70.29 | v34.35,94.74 34.29,94.74 34.2,94.65 | J3.2 165.1,18.61 158.56,18.61 137.29,39.88 C1_BAT2.1 137.16,39.94 135.45,39.94 133.48,37.97 C3.+ 133.35,37.91 129.73,41.53 128.46,41.53 IC4.5 128.4,41.4 128.4,40.83 124.52,36.96 124.52,36.26 124.02,35.75 87.76,35.75 v87.44,36.07 | R1_PINH1.2 95.25,60.33 98.81,56.77 98.81,48.9 96.9,46.99 R2_PINH1.2 90.68,46.93 89.6,45.85 v87.44,45.85 | D7.2 92.52,64.77 92.52,63.12 95.19,60.45 R1_PINH1.2 | U3.2 90.81,58.86 91.76,57.91 92.46,57.91 95,60.45 R1_PINH1.2 | U1.7 40.7,56.52 40.7,57.78 U1.8 | v26.48,50.55 26.61,50.55 31.3,55.24 U1.3 33.08,55.31 33.91,55.31 34.16,55.56 34.16,57.47 35.05,58.36 38.61,58.36 39.12,57.85 40.58,57.85 U1.8 | R6.2 31.75,50.23 v27.43,50.23 27.37,50.1 27.37,45.78 v26.04,44.45 | R_CL1.2 78.04,21.59 78.04,22.16 77.34,22.86 Q2.3 77.28,22.99 75.75,24.51 | 75.75,24.51 73.34,24.51 72.39,23.56 R9.2 72.26,23.62 53.53,23.62 40.26,36.89 40.13,36.96 | 40.13,38.8 41.91,38.8 R7.2 42.04,38.8 44.45,38.8 R8.2 | 40.13,38.8 39.37,38.8 R5.2 | 19.81,42.04 19.81,43.05 19.05,43.81 R1.2 | 19.81,42.04 19.62,41.85 12.38,41.85 8.76,45.47 8.76,45.85 U2.2
  Top 0.3: 40.13,36.96 40.13,38.8 | 40.13,36.96 39.94,36.77 25.15,36.77 21.75,40.16 | 21.75,40.16 19.94,41.97 19.81,42.04 | 21.75,40.16 v24.51,42.93 | v76.58,25.4 75.82,24.64 75.75,24.51 | v40.64,63.12 40.64,57.98 U1.8
  Bottom 0.3: v53.02,106.55 46.86,106.55 46.35,106.05 v45.72,106.05 45.59,105.98 v34.35,94.74 | v27.43,50.23 26.8,50.23 v26.48,50.55 | v24.51,42.93 v26.04,44.45 | v87.44,45.85 87.44,36.26 87.34,36.16 | v76.58,25.4 87.34,36.16 | v87.44,36.07 87.34,36.16 | v46.29,70.29 46.29,68.77 v40.64,63.12
32KHZ
  Top 0.127: 89.03,54.23 89.03,61.59 90.36,62.93 91.19,62.93 91.5,62.61 91.5,59.88 92.08,59.31 U3.1 | 89.03,54.23 89.03,48.9 89.47,48.45 89.47,46.99 R2_PINH1.1 | 89.03,54.23 71.56,54.23 62.23,63.56 35.05,63.56 17.65,46.16 17.65,45.91 U2.9
DN  (via drill 0.3)
  Top 0.127: 163.35,53.94 163.19,54.1 163.19,54.61 163.39,54.8 163.96,54.8 J2.A7 | 163.35,53.94 163.39,53.91 163.96,53.91 J2.B7 | v162.62,50.42 160.84,48.64 156.21,48.64 D1.4 | 163.35,53.94 v163,53.59
  Bottom 0.127: v162.62,50.42 162.62,53.21 v163,53.59
DP
  Top 0.127: 164.56,54.45 164.78,54.67 164.78,55.05 164.53,55.31 164.02,55.31 J2.B6 | 164.56,54.45 164.53,54.42 164.02,54.42 J2.A6 | 164.56,54.45 165.67,53.34 165.67,51.5 165.04,50.86 162.43,50.86 161.93,50.35 158.05,50.35 157.99,50.42 156.21,50.42 D1.6
EPD_3V3  (via drill 0.3)
  Top 0.127: C7.1 73.66,22.16 73.85,21.97 75.18,21.97 Q2.2 75.25,21.97 v77.34,21.97 | J1.16 83.38,15.43 83.82,15.43 J1.15 83.88,15.37 83.88,14.73 v84.01,14.61 | v86.68,20.7 87.63,19.75 EPD_C5.2 | v85.6,23.05 82.55,23.05 L1.2 | TP17.TP 38.48,77.47 v47.37,68.58
  Bottom 0.127: v84.01,14.61 84.01,14.86 86.42,17.27 86.42,20.51 86.61,20.7 v86.68,20.7 86.68,21.97 v85.6,23.05 84.39,23.05 83.31,21.97 v77.34,21.97 76.39,21.97 47.37,50.99 v47.37,68.58
EPD_3V3_C  (via drill 0.3)
  Top 0.127: v76.45,22.54 75.25,23.75 Q2.1 | v78.42,22.54 79.38,21.59 R_CL1.1 | v39.62,66.8 23.37,66.8 20.19,63.63 20.19,63.37 U2.18 | TP13.TP v56.13,76.45 56.07,76.39 56.07,71.37 v56.52,70.93
  Bottom 0.127: v78.42,22.54 v76.45,22.54 76.45,24.89 76.14,25.21 76.14,51.31 v56.52,70.93 | v39.62,66.8 49.28,76.45 v56.13,76.45
EPD_BUSY  (via drill 0.3)
  Top 0.127: v87.38,16.51 86.87,16 86.87,15.43 J1.9 | v68.07,81.79 v68.07,70.61 | TP9.TP v65.79,84.07 | v29.4,83 10.03,63.63 10.03,63.37 U2.26
  Bottom 0.127: v87.38,16.51 87.38,17.14 88.01,17.78 88.01,35.62 88.14,35.75 88.14,50.55 v68.07,70.61 | v68.07,81.79 v65.79,84.07 65.79,84.01 64.77,83 v29.4,83
EPD_CS  (via drill 0.3)
  Top 0.127: 75.5,19.24 77.03,20.77 79.69,20.77 80.07,21.14 87.31,21.14 88.58,19.88 88.58,17.84 87.69,16.95 86.55,16.95 85.34,15.75 J1.12 | 75.5,19.24 75.5,19.05 D6.1 75.5,19.24 | 72.39,22.16 72.58,22.16 75.5,19.24 | v23.3,42.48 20.19,45.59 20.19,45.85 U2.11 20.19,45.91 20.19,46.16 30.54,56.52 v30.99,56.52 | v71.56,21.84 72.07,21.84 72.39,22.16 | 72.39,22.16 R9.1 | TP10.TP 69.41,85.09 v56.52,72.2
  Bottom 0.127: v23.3,42.48 36.26,42.48 56.9,21.84 v71.56,21.84 | v56.52,72.2 46.67,72.2 v30.99,56.52
EPD_DC  (via drill 0.3)
  Top 0.127: v86.11,14.61 85.85,14.86 85.85,15.37 J1.11 | TP11.TP v72.39,66.93 | v30.29,64.52 12.57,46.8 12.57,45.91 U2.5
  Bottom 0.127: v86.11,14.61 88.27,16.76 88.27,35.5 88.39,35.62 88.39,50.93 v72.39,66.93 66.67,72.64 46.74,72.64 38.61,64.52 v30.29,64.52
EPD_RST  (via drill 0.3)
  Top 0.127: v86.74,16.51 86.36,16.13 86.36,15.43 J1.10 | TP12.TP 65.85,76.39 v65.85,72.2 61.78,68.14 20.89,68.14 16.38,63.63 16.38,63.37 U2.21
  Bottom 0.127: v86.74,16.51 86.74,16.89 87.76,17.91 87.76,35.75 87.88,35.88 87.88,50.16 v65.85,72.2
FLASH_CS
  Top 0.127: R5.1 39.37,37.66 38.67,38.35 38.67,40.45 38.7,40.48 | 38.7,40.48 39.37,41.15 D9.1 | U1.1 32.89,57.78 32.89,57.59 21.46,46.16 21.46,45.91 U2.12 21.46,45.85 21.46,45.59 22.16,44.9 23.18,44.9 27.56,40.51 38.67,40.51 38.7,40.48
GDR  (via drill 0.3)
  Top 0.127: J1.2 90.3,15.37 90.3,14.86 87.76,12.32 74.68,12.32 71.75,15.24 R4.2 71.69,15.24 71.63,15.3 v70.99,15.3 | v68.58,15.43 67.94,15.43 Q3.1
  Bottom 0.127: v68.58,15.43 70.87,15.43 v70.99,15.3
GND  (via drill 0.3, 0.35)  (6 unrouted)
  Top 0.127: 33.85,53.98 34.92,53.98 U1.9 36.83,55.82 69.6,55.82 74.23,51.18 88.33,51.18 88.36,51.15 | 33.85,53.98 U1.4 | 39.37,42.67 40.45,42.67 40.58,42.8 41.78,42.8 41.91,42.67 | 33.62,49.82 39.37,44.07 39.37,42.67 | 33.62,49.82 33.21,50.23 33.02,50.23 D10.2 | 39.37,42.67 D9.2 | 41.91,42.67 44.45,42.67 D12.2 | 41.91,42.67 D11.2 | v33.85,51.37 33.85,53.98 | 33.62,49.82 v33.85,50.04 | 17.21,97.79 17.21,92.14 15.43,90.36 J4.G2 15.43,90.3 16.19,89.53 16.19,86.49 15.43,85.72 15.43,84.71 J4.G1 15.37,84.64 15.37,72.07 7.49,64.2 7.49,63.37 U2.28 7.49,63.31 7.49,58.74 11.87,54.36 U2.29_3 11.94,54.29 11.94,53.15 U2.29_2 | U2.29_9 14.41,54.29 14.41,53.15 U2.29_8 14.35,53.15 13.21,53.15 U2.29_5 | U2.29_1 11.94,51.88 11.94,53.09 U2.29_2 | U2.29_1 12,51.88 13.14,51.88 U2.29_4 13.21,51.88 14.35,51.88 U2.29_7 | U2.29_5 13.14,53.15 12,53.15 U2.29_2 | U2.29_6 13.14,54.29 13.14,53.21 U2.29_5 | v9.53,48.96 7.49,46.93 7.49,45.91 U2.1 | v11.62,51.05 11.62,51.56 11.87,51.82 U2.29_1 | J4.P6 4.83,91.95 6.16,91.95 6.41,92.2 6.41,93.22 12.7,99.5 C9.2 12.7,100.46 13.62,101.38 | J4.G3 1.21,81.66 1.21,88.46 4.76,92.01 J4.P6 | J4.G4 2.16,94.74 2.16,94.42 4.64,91.95 J4.P6 | CHANGE_BUTTON.2 65.22,107.7 61.78,107.7 CHANGE_BUTTON.1 61.72,107.7 60.83,108.58 60.52,108.58 C10.2 60.45,108.65 52.58,108.65 C6.2 52.51,108.58 52.2,108.58 51.31,107.7 RESET_BUTTON.2 | RESET_BUTTON.1 47.82,107.76 51.24,107.76 RESET_BUTTON.2 | 51.31,103.06 49.15,103.06 48.96,102.87 48.96,102.62 47.05,100.71 46.86,100.71 IC1.3 46.8,100.65 v46.04,100.65 | 51.31,103.06 52.07,102.3 C_DELAY.2 | 51.31,103.06 51.31,107.63 RESET_BUTTON.2
  Top 0.127: C5.2 27.11,108.58 26.8,108.58 25.91,107.7 BOOT_BUTTON.2 | BOOT_BUTTON.2 25.84,107.7 22.42,107.7 BOOT_BUTTON.1 22.35,107.76 21.78,108.33 20.57,108.33 13.62,101.38 | TP5.TP 51.63,85.09 44.04,92.68 | 44.04,92.68 44.01,92.71 37.97,92.71 25.91,104.78 25.91,107.63 BOOT_BUTTON.2 | v44.07,92.84 44.07,92.71 44.04,92.68 | v14.99,100.01 17.21,97.79 | 17.21,97.79 D8.2 | v13.65,101.35 13.62,101.38 | 80.01,18.41 78.74,18.41 EPD_C12.1 78.74,18.35 v78.11,17.72 | 80.01,18.41 81.28,18.41 | 80.01,18.41 EPD_C11.1 | 81.28,18.41 82.55,18.41 | 81.28,18.41 EPD_C10.1 | 82.55,18.41 83.82,18.41 | 82.55,18.41 EPD_C9.1 | 83.82,18.41 85.09,18.41 | 83.82,18.41 EPD_C8.1 | 85.09,18.41 86.36,18.41 | 85.09,18.41 EPD_C7.1 | 86.36,18.41 87.63,18.41 EPD_C5.1 | 86.36,18.41 EPD_C6.1 | v77.22,18.22 76.96,18.48 76.96,19.05 D6.2 | J1.MP2 78.3,12.95 75.37,12.95 73.09,15.24 R4.1 72.83,15.24 72.14,15.94 70.99,15.94 68.01,12.95 68.01,10.35 67.88,10.22 66.48,10.22 65.53,11.18 SJ1.1 65.53,11.24 64.71,10.41 63.31,10.41 63.18,10.54 63.18,12.32 64.83,13.97 R2.1 65.41,13.97 67.44,16 67.44,16.07 68.2,16.83 70.42,16.83 | 70.42,16.83 70.87,16.83 71.12,17.08 EPD_C2.1 71.12,17.14 72.39,17.14 | 70.42,16.83 70.42,21.34 71.88,22.8 72.77,22.8 73.47,23.5 73.66,23.5 C7.2 | 72.39,17.14 74.49,17.14 v75.56,18.22 75.44,18.03 79.31,14.16 82.55,14.16 83.15,14.76 | 72.39,17.14 EPD_C1.1 | C10_SUPERCAP.1 97.79,51.88 97.41,51.5 95.25,51.5 C8.2 95.25,51.44 95.19,51.37 v94.42,51.37 | U3.13 88.27,51.05 88.36,51.15 | v88.58,51.37 88.36,51.15 | 83.15,14.76 83.76,14.16 86.42,14.16 87.31,15.05 87.31,15.37 J1.8 87.38,15.43 87.38,15.81 87.63,16.07 88.84,16.07
  Top 0.127: 83.15,14.76 82.87,15.05 82.87,15.37 J1.17 | 88.84,16.07 91.06,16.07 91.82,15.3 91.82,12.95 J1.MP1 | 88.46,26.67 88.46,20.38 88.84,20 88.84,16.07 | v88.71,27.43 88.71,26.92 88.46,26.67 | 88.46,26.67 D3.1 | IC4.2 125.73,40.64 126.3,40.07 126.3,39.37 123.89,36.96 123.89,36.83 C1_BAT1.2 123.83,36.83 123.13,36.13 122.11,36.13 119.38,38.86 R1_PWRUSB.1 119.38,40.01 121.16,40.01 122.24,41.08 124.02,41.08 127.89,44.96 129.54,44.96 R2_BAT.1 | C1_BAT2.2 137.16,41.27 133.73,41.27 133.35,40.89 C3.- 133.35,40.96 132.59,40.96 v131.89,41.66 | R2_BAT.1 129.54,45.28 132.87,48.61 | 132.87,48.61 132.91,48.64 132.91,50.23 132.33,50.8 MCP73831.2 | v131.89,42.67 129.54,45.02 R2_BAT.1 | 151.13,48.9 v152.72,48.9 152.78,48.9 153.42,49.53 D1.2 | U4.9 140.97,50.74 140.34,50.1 140.02,50.1 U4.4 139.95,50.04 139.95,48.45 138.94,47.43 137.92,47.43 136.78,48.58 132.91,48.58 132.87,48.61 | U4.9 140.91,50.61 141.92,50.61 U4.6 141.99,50.55 142.24,50.55 143.89,48.9 151.13,48.9 | U4.9 140.97,50.86 140.34,51.5 140.02,51.5 U4.1 139.95,51.56 136.72,51.56 135.57,52.7 134.62,52.7 C2_BAT.2 134.62,52.77 134.24,53.15 123.06,53.15 121.98,52.07 v120.78,52.07 C1_BAT.2 | 151.13,48.9 R2-USB1.1 | 157.86,3.24 158.43,3.24 C2.2 | 157.86,3.24 157.29,3.24 C1.2 | 157.86,5.46 158.18,5.46 158.69,5.97 158.69,6.16 SENSOR2.5 | 157.86,5.46 157.54,5.46 157.1,5.91 157.1,6.16 SENSOR2.7 157.04,6.22 157.04,6.41 156.34,7.11 156.34,9.02 SENSOR2.1 156.34,9.08 156.34,10.22 163.64,17.53 165.1,17.53 J3.1 165.1,17.59 165.42,17.59 167.07,19.24 v167.07,49.34 168.21,49.34 168.4,49.53 J2.MP1 168.47,49.53 168.47,59.69 J2.MP2 168.4,59.69 164.59,59.69 J2.MP4
  Top 0.127: 157.86,5.46 157.86,3.24 | v159.89,52.7 158.75,52.7 R2-USB.2 | v161.1,51.5 163.96,51.5 J2.B12 163.96,51.44 163.96,51.31 J2.A1 | C5_USB.2 156.84,44.45 156.84,45.72 C4_USB.2 160.78,45.72 164.53,49.47 J2.MP3 163.7,48.7 v163.13,49.28 | J2.B1 164.02,57.72 164.02,57.91 J2.A12 164.02,57.98 164.02,59.18 164.53,59.69 J2.MP4 | TP4.TP 151.13,61.78 149.92,62.99 149.92,64.01 150.62,64.71 158.56,64.71 164.02,59.24 J2.MP4
  Bottom 0.127: v33.85,50.04 33.85,50.99 | 33.85,50.99 v33.85,51.37 | v9.53,48.96 v11.62,51.05 11.62,50.99 33.85,50.99 | v46.04,100.65 46.04,94.81 v44.07,92.84 | v13.65,101.35 v14.99,100.01 | v78.11,17.72 77.6,18.22 v77.22,18.22 v75.56,18.22 | 88.71,51.37 v94.42,51.37 120.08,51.37 v120.78,52.07 | v88.71,27.43 88.71,51.37 | 88.71,51.37 v88.58,51.37 | v131.89,42.67 v131.89,41.66 | v167.07,49.34 163.13,49.34 v163.13,49.28 161.1,51.31 v161.1,51.5 v159.89,52.7 159.89,52.64 156.15,48.9 v152.72,48.9
  other vias: 72.39,60.96 54.61,66.04 39.37,71.12 52.07,74.93 38.1,60.96 31.75,43.18 86.36,33.02 83.82,21.59
  pour Top: 248.84,-11.35 248.84,145.97 -27.96,145.97 -27.98,145.99 -28,146.01 -28.02,146.03 -28.02,147.14 -29.13,146.02 -29.13,-11.35
  pour Bottom: -25.32,-3.73 236.14,-3.73 236.14,143.43 -25.32,143.43
GPIO8
  Top 0.127: R1.1 19.05,42.74 18.35,43.43 18.35,45.34 18.86,45.85 U2.10
I2C_PW  (via drill 0.3)
  Top 0.127: C1.1 157.29,1.91 158.43,1.91 C2.1 158.43,1.97 159.19,2.73 159.19,6.67 158.94,6.92 157.86,6.92 | 157.86,6.92 v157.86,7.05 157.86,8.06 157.1,8.83 157.1,9.02 SENSOR2.2 | 157.86,6.92 157.86,6.22 SENSOR2.6 | 156.21,3.56 155.26,3.56 154.94,3.87 R1_PINH.2 154.94,3.94 127.19,31.69 91.19,31.69 81.47,41.4 v75.69,41.4 | 156.21,3.56 156.27,3.62 v156.27,5.27 SENSOR2.8 | 156.21,3.56 R2_PINH.2 | v51.69,65.41 23.24,65.41 21.46,63.63 21.46,63.37 U2.17
  Bottom 0.127: v75.69,41.4 v51.69,65.41 | v157.86,7.05 157.86,6.86 v156.27,5.27
INT_RTC  (via drill 0.3)
  Top 0.127: v94.3,58.99 95.25,58.99 R1_PINH1.1 | v89.72,57.85 89.72,59.05 89.53,59.24 U3.3 | v29.84,62.8 16.38,49.34 16.38,45.91 U2.8 | TP15.TP v48.51,76.45
  Bottom 0.127: v94.3,58.99 90.87,58.99 v89.72,57.85 89.72,57.91 84.39,57.91 65.41,76.9 48.96,76.9 v48.51,76.45 41.59,76.45 29.84,64.71 v29.84,62.8
IO/BOOT  (via drill 0.3)
  Top 0.127: R_BOOT.1 21.08,109.09 22.29,109.09 22.35,109.16 BOOT_BUTTON.4 22.42,109.22 25.84,109.22 BOOT_BUTTON.3 25.91,109.16 27.69,109.16 36.7,100.14 38.16,100.14 | 38.16,100.14 52.39,100.14 52.77,100.52 52.77,102.68 52.58,102.87 52.58,107.25 C6.1 | v25.15,64.52 24,63.37 U2.15 | 38.16,100.14 v38.16,93.15
  Bottom 0.127: v25.15,64.52 25.15,80.14 v38.16,93.15
IO/CHANGE  (via drill 0.3)
  Top 0.127: R_CHANGE.1 66.48,109.09 65.34,109.09 65.28,109.16 CHANGE_BUTTON.3 65.22,109.22 61.78,109.22 CHANGE_BUTTON.4 61.72,109.22 61.59,109.35 v60.64,109.35 | v59.82,107.95 60.45,107.31 C10.1 | v33.66,83.44 13.84,63.63 13.84,63.37 U2.23
  Bottom 0.127: v60.64,109.35 59.82,108.52 v59.82,107.95 35.31,83.44 v33.66,83.44
MISO  (via drill 0.3)
  Top 0.127: R8.1 44.45,37.66 45.15,38.35 45.15,40.45 44.45,41.15 D12.1 44.45,41.08 43.56,40.2 41.21,40.2 40.58,40.83 v40.32,40.83 | v33.66,55.82 32.96,56.52 U1.2 | v25.97,60.9 10.92,60.9 8.76,63.06 8.76,63.31 U2.27 8.7,63.37 8.45,63.63 v8.45,64.52 | v5.97,92.39 5.33,93.03 5.02,93.03 J4.P7 | TP6.TP 87.63,98.61 71.25,82.23 67.18,82.23 v56.52,71.56
  Bottom 0.127: v33.66,55.82 33.66,55.37 40.32,48.7 v40.32,40.83 | v25.97,60.9 31.05,55.82 v33.66,55.82 | v5.97,92.39 5.97,89.09 8.45,86.61 v8.45,64.52 | v56.52,71.56 46.93,71.56 33.66,58.29 v33.66,55.82
MOSI  (via drill 0.3)
  Top 0.127: v83.95,16.19 84.33,15.81 84.33,15.43 J1.14 | v60.83,36.89 42.42,36.89 41.91,37.4 R7.1 41.91,37.47 v41.08,38.29 | v40.77,45.85 40.77,53.98 U1.5 | v40.77,42.35 41.91,41.21 D11.1 | v16.95,44.77 15.94,44.77 15.11,45.59 15.11,45.85 U2.7 | v6.16,88.27 5.78,88.65 5.02,88.65 J4.P3 | TP7.TP 79.18,101.6 61.47,83.88 52.45,83.88 50.04,86.3 49.02,86.3 47.37,84.64 v47.37,69.22
  Bottom 0.127: v83.95,16.19 83.44,16.19 78.68,20.95 76.77,20.95 v60.83,36.89 | 40.55,40.42 40.77,40.64 v40.77,42.35 v40.77,45.85 40.77,62.61 v47.37,69.22 | 40.55,40.42 40.51,40.39 40.13,40.39 35.62,44.9 25.84,44.9 25.72,44.77 v16.95,44.77 13.08,44.77 9.08,48.77 9.08,62.42 6.16,65.34 v6.16,88.27 | v41.08,38.29 41.08,39.88 40.55,40.42
N$1
  Top 0.127: R2-USB.1 158.75,51.44 159.26,51.44 163.19,55.37 163.19,56.13 163.39,56.33 163.96,56.33 J2.B5
N$2
  Top 0.127: 92.55,29.88 91.95,30.48 D4.1 | 92.55,29.88 92.58,29.84 93.98,29.84 C4.1 | 92.55,29.88 91.95,29.27 91.95,26.67 D3.2
N$3
  Top 0.127: 122.46,39.02 121.92,39.56 D2.1 | 122.46,39.02 122.49,38.99 122.49,36.83 C1_BAT1.1 | 124.94,40.23 124.9,40.26 124.9,41.02 125.41,41.53 125.54,41.53 IC4.1 126.11,42.1 134.75,42.1 138.62,45.97 139.32,45.97 Q1.2 | 124.94,40.23 125.41,39.75 125.54,39.75 IC4.3 | 124.94,40.23 123.76,39.05 122.49,39.05 122.46,39.02
N$4
  Top 0.127: J1.24 79.31,15.43 79.31,15.88 77.66,17.53 77.66,18.61 78.74,19.68 EPD_C12.2
N$5
  Top 0.127: R1_BAT.2 128.02,49.53 128.84,50.35 131.38,50.35 131.83,49.91 132.08,49.91 MCP73831.1
N$6
  Top 0.127: CHG_LED.C 123.76,52.07 123.76,49.53 R1_BAT.1
N$7
  Top 0.127: R2_BAT.2 129.54,49.85 MCP73831.5
N$8
  Top 0.127: C_DELAY.1 52.07,100.97 51.24,100.97 49.72,102.49 IC1.5
N$9  (via drill 0.3)
  Top 0.127: v152.21,50.23 151.13,50.23 R2-USB1.2 | v162.18,53.15 163.19,53.15 163.39,53.34 163.96,53.34 J2.A5
  Bottom 0.127: v152.21,50.23 156.78,50.23 159.7,53.15 v162.18,53.15
N$10  (via drill 0.3)
  Top 0.127: v78.8,17.65 79.06,17.65 80.33,16.38 80.33,15.43 J1.22 | v76.96,21.4 v76.01,20.45 | v81.47,20.45 81.47,19.94 81.28,19.75 EPD_C10.2
  Bottom 0.127: v76.01,20.45 v78.8,17.65 | v76.96,21.4 80.52,21.4 v81.47,20.45
N$11
  Top 0.127: D7.1 90.42,64.77 90.42,64.07 92.08,62.42 92.08,62.23 R_CAPACITOR.2
N$12
  Top 0.127: J1.20 81.34,16.64 81.92,17.21 87.57,17.21 88.33,17.97 88.33,18.8 88.01,19.11 84.39,19.11 83.82,19.68 EPD_C8.2
N$13
  Top 0.127: J1.19 81.79,15.37 81.79,14.99 81.6,14.8 79.12,14.8 76.26,17.65 76.26,19.62 77.15,20.51 80.9,20.51 81.28,20.89 83.95,20.89 85.09,19.75 EPD_C7.2
N$14  (via drill 0.3)
  Top 0.127: v82.36,14.61 82.36,15.37 J1.18 | v85.72,20.38 86.36,19.75 EPD_C6.2
  Bottom 0.127: v82.36,14.61 83.38,14.61 85.72,16.95 v85.72,20.38
N$22  (via drill 0.3)
  Top 0.127: v88.77,14.35 89.28,14.86 89.28,15.37 J1.4 | v73.22,18.03 72.96,18.03 72.58,18.41 72.39,18.41 EPD_C1.2
  Bottom 0.127: v88.77,14.35 88.33,13.91 77.34,13.91 v73.22,18.03
N$23  (via drill 0.3)
  Top 0.127: v88.14,14.35 88.84,15.05 88.84,15.37 J1.5 | v74.3,17.59 73.03,17.59 72.77,17.84 71.69,17.84 71.12,18.41 EPD_C2.2
  Bottom 0.127: v88.14,14.35 86.61,14.35 86.42,14.16 77.72,14.16 v74.3,17.59
PREVGH  (via drill 0.3)
  Top 0.127: v82.61,20.45 82.61,19.81 82.55,19.75 EPD_C9.2 | J1.21 80.9,15.43 80.9,16.57 81.98,17.65 v82.61,17.65 v86.87,17.65 | v80.83,28.51 80.83,30.48 D5.1
  Bottom 0.127: v82.61,20.45 v82.61,17.65 | v86.87,17.65 87.12,17.91 87.12,22.12 80.83,28.4 v80.83,28.51
PREVGL  (via drill 0.3)
  Top 0.127: v79.88,16.19 79.88,15.43 J1.23 | v77.92,20 78.17,20.26 79.5,20.26 80.01,19.75 EPD_C11.2 | D4.2 88.39,30.48 88.39,27.94 86.02,25.56 86.02,22.45 v85.15,21.59
  Bottom 0.127: v79.88,16.19 82.17,16.19 82.39,16.41 | 82.39,16.41 82.42,16.45 82.42,16.83 79.25,20 v77.92,20 | v85.15,21.59 85.15,16.76 84.14,15.75 83.06,15.75 82.39,16.41
RESE
  Top 0.127: J1.3 89.79,15.37 89.79,14.73 88.96,13.91 75.5,13.91 73.22,16.19 69.98,16.19 69.28,15.49 Q3.2 69.22,15.43 67.31,13.53 R3.2
RESE'
  Top 0.127: R3.1 67.31,10.99 66.61,11.68 66.61,12.45 | 66.61,12.45 66.61,13.91 66.67,13.97 R2.2 | SJ1.2 64.01,11.62 64.83,12.45 66.61,12.45
RESET  (via drill 0.3)
  Top 0.127: RESET_BUTTON.3 51.24,109.22 47.82,109.22 RESET_BUTTON.4 47.75,109.22 46.8,109.22 v46.67,109.35 | v28.96,107.25 27.18,107.25 C5.1 | R_RESET.1 46.48,107.25 46.1,106.87 v46.1,106.55 46.8,105.86 46.8,102.55 IC1.1 | v9.97,51.44 9.97,45.91 U2.3
  Bottom 0.127: v46.1,106.55 45.43,107.22 | 45.43,107.22 45.4,107.25 v28.96,107.25 9.84,88.14 9.84,75.69 9.97,75.56 v9.97,51.44 | v46.67,109.35 46.67,108.46 45.43,107.22
RTC_RST  (via drill 0.3)
  Top 0.127: v60.58,64.96 24.07,64.96 22.73,63.63 22.73,63.37 U2.16 | v61.85,64.96 82.87,64.96 88.27,59.56 U3.4
  Bottom 0.127: v61.85,64.96 v60.58,64.96
RX
  Top 0.127: TP2.TP 40.7,83.88 32.83,83.88 12.57,63.63 12.57,63.37 U2.24
SCK  (via drill 0.3)
  Top 0.127: 33.02,48.83 31.75,48.83 R6.1 | v81.98,16.64 84.14,16.64 84.84,15.94 J1.13 | v41.85,55.24 U1.6 40.7,55.24 37.08,51.63 v36.77,51.63 | v33.97,48.83 33.02,48.83 | 33.02,48.83 D10.1 | v10.29,75.88 3.81,82.36 3.81,90.17 4.45,90.81 4.95,90.81 J4.P5 | v26.23,59.82 13.84,47.43 13.84,45.91 U2.6 | TP8.TP 54.23,101.6 46.86,94.23 v38.61,94.23
  Bottom 0.127: v81.98,16.64 80.45,16.64 v41.85,55.24 | v36.77,51.63 35.66,50.51 | 35.66,50.51 v33.97,48.83 | 35.66,50.51 26.26,59.91 | 26.26,59.91 15.27,70.9 | 15.27,70.9 v10.29,75.88 | v26.23,59.82 26.23,59.88 26.26,59.91 | 15.27,70.9 v38.61,94.23
SCL  (via drill 0.3)
  Top 0.127: R2_PINH.1 156.21,2.41 155.45,3.17 154.43,3.17 154.24,2.98 154.24,2.22 155.38,1.08 159.13,1.08 159.7,1.65 159.7,8 158.69,9.02 SENSOR2.4 v158.69,11.94 | v144.08,49.34 142.43,50.99 141.99,50.99 U4.7 | 164.43,21.24 165.1,20.57 J3.4 | 164.43,21.24 v144.08,41.59 | v164.4,21.21 164.43,21.24 | v87.88,54.67 71.5,54.67 58.48,67.69 21.72,67.69 17.65,63.63 17.65,63.37 U2.20 | v90.74,51.82 90.74,51.63 92.08,50.29 U3.16
  Bottom 0.127: v144.08,41.59 144.08,45.66 | 144.08,45.66 v144.08,49.34 | v158.69,11.94 158.69,15.49 v164.4,21.21 | v87.88,54.67 v90.74,51.82 90.74,51.88 91.38,52.51 120.97,52.51 127.83,45.66 144.08,45.66
SDA  (via drill 0.3)
  Top 0.127: R1_PINH.1 154.94,2.35 155.96,1.33 159,1.33 159.45,1.78 159.45,7.3 157.92,8.83 157.92,9.02 SENSOR2.3 157.92,9.08 v157.92,10.54 | v144.72,49.34 142.56,51.5 141.99,51.5 U4.8 | v144.72,39.69 164.85,19.56 J3.3 164.59,19.75 v164.02,19.18 | v40.7,67.25 22.54,67.25 18.92,63.63 18.92,63.37 U2.19 | v90.11,51.82 90.11,50.67 90.81,49.97 U3.15 90.81,49.66 v91.95,48.51
  Bottom 0.127: v144.72,39.69 144.72,41.15 | 144.72,41.15 v144.72,49.34 | v157.92,10.54 164.02,16.64 v164.02,19.18 | v40.7,67.25 40.96,67.25 46.61,72.9 69.03,72.9 v90.11,51.82 | 144.72,41.15 99.31,41.15 v91.95,48.51
SRC  (via drill 0.3)
  Top 0.127: C4.2 93.98,31.11 84.96,31.11 84.33,30.48 D5.2 84.26,30.48 84.26,29.4 L1.1 82.55,27.62 75.95,27.62 72.58,24.26 v72.2,24.26 | Q3.3 68.58,20.64 v71.06,23.11
  Bottom 0.127: v72.2,24.26 v71.06,23.11
SS_SD
  Top 0.127: 13.97,98.36 15.18,98.36 15.75,97.79 D8.1 | 6.13,87.6 13.97,95.44 13.97,98.36 | 6.13,87.6 6.1,87.57 5.46,87.57 J4.P2 | 13.97,98.36 R10.1 | 6.13,87.6 10.73,83 10.73,75.69 6.79,71.75 6.79,55.24 11.24,50.8 11.24,45.91 U2.4
TX
  Top 0.127: TP1.TP 32.77,85.09 11.3,63.63 11.3,63.37 U2.25
USB_D+
  Top 0.127: D1.1 153.67,50.48 152.59,50.48 149.67,53.4 104.2,53.4 92.65,41.85 43.88,41.85 42.48,40.45 41.34,40.45 39.81,41.97 27.88,41.97 24,45.85 U2.14
USB_D-
  Top 0.127: D1.3 153.73,48.64 153.99,48.64 154.5,49.15 154.5,50.86 151.7,53.66 104.08,53.66 95.82,45.4 39.18,45.4 33.59,50.99 27.56,50.99 22.73,46.16 22.73,45.91 U2.13
VBAT  (via drill 0.3)
  Top 0.3: U4.2 140.02,50.99 140.02,50.61 U4.3 139.89,50.48 139.51,50.48 138.43,49.4 | 138.43,49.4 Q1.3 | 138.43,49.4 138.3,49.47 136.4,51.37 134.75,51.37 C2_BAT.1 134.62,51.44 132.4,51.44 132.14,51.69 MCP73831.3 132.02,51.82 v131.44,52.39 | v56.13,78.49 TP3.TP
  Bottom 0.3: v56.13,78.49 80.26,78.49 105.86,52.9 130.94,52.9 v131.44,52.39
VBUS  (via drill 0.3)
  Top 0.3: R1_PWRUSB.2 119.38,41.34 121.6,41.34 121.92,41.66 D2.2 121.86,41.78 121.86,51.24 121.73,51.31 | 121.73,51.31 119.51,51.31 118.75,52.07 C1_BAT.1 | 121.73,51.31 123.19,52.77 124.46,52.77 125.09,52.13 CHG_LED.A 129.16,52.07 129.48,51.75 MCP73831.4 129.6,51.69 v131.13,51.69 | 154.5,46.74 138.88,46.74 138.18,46.04 137.54,46.04 Q1.1 137.41,46.1 v136.72,46.1 | 154.5,46.74 155.51,45.72 C4_USB.1 155.57,45.59 155.57,44.45 C5_USB.1 155.64,44.32 157.48,42.48 157.48,40.64 PFMF.050.1.2 | 154.5,46.74 154.62,46.8 154.62,48.32 155.83,49.53 D1.5 155.7,49.59 155.26,50.04 155.26,58.67 151.13,62.8 TP14.TP
  Bottom 0.3: v136.72,46.1 v131.13,51.69
VRTC
  Top 0.127: C10_SUPERCAP.2 97.79,49.72 97.41,50.1 95.25,50.1 C8.1 95.25,50.16 93.47,50.16 91.19,52.45 90.17,52.45 90.14,52.48 | 90.14,52.48 89.53,51.88 U3.14 | 90.14,52.48 90.17,52.51 90.17,60.2 90.74,60.77 90.74,62.23 R_CAPACITOR.1
VUSB
  Top 0.3: J2.B9 164.02,52.32 164.02,52.07 J2.A4 163.83,52.01 160.59,52.01 159.32,50.74 158.18,50.74 157.99,50.93 157.99,53.21 161.61,56.83 163.83,56.83 J2.B4 | J2.B4 164.02,56.9 164.02,57.15 J2.A9 | PFMF.050.1.1 154.56,40.64 156.66,38.54 158.37,38.54 166.05,46.23 166.05,55.44 164.66,56.83 164.15,56.83 J2.B4